# Altium PCB HVAL_TSAL.PcbDoc
Units mil, origin at the board's own origin, x right, y up, seen from the top; angles counter-clockwise.
Board outline 3937.01 x 3149.61 mil, 2 copper layers (Top, Bottom); 27 components, 31 nets, 125 pads, 5 vias.
Unrouted connection lines stored in the file: 1.
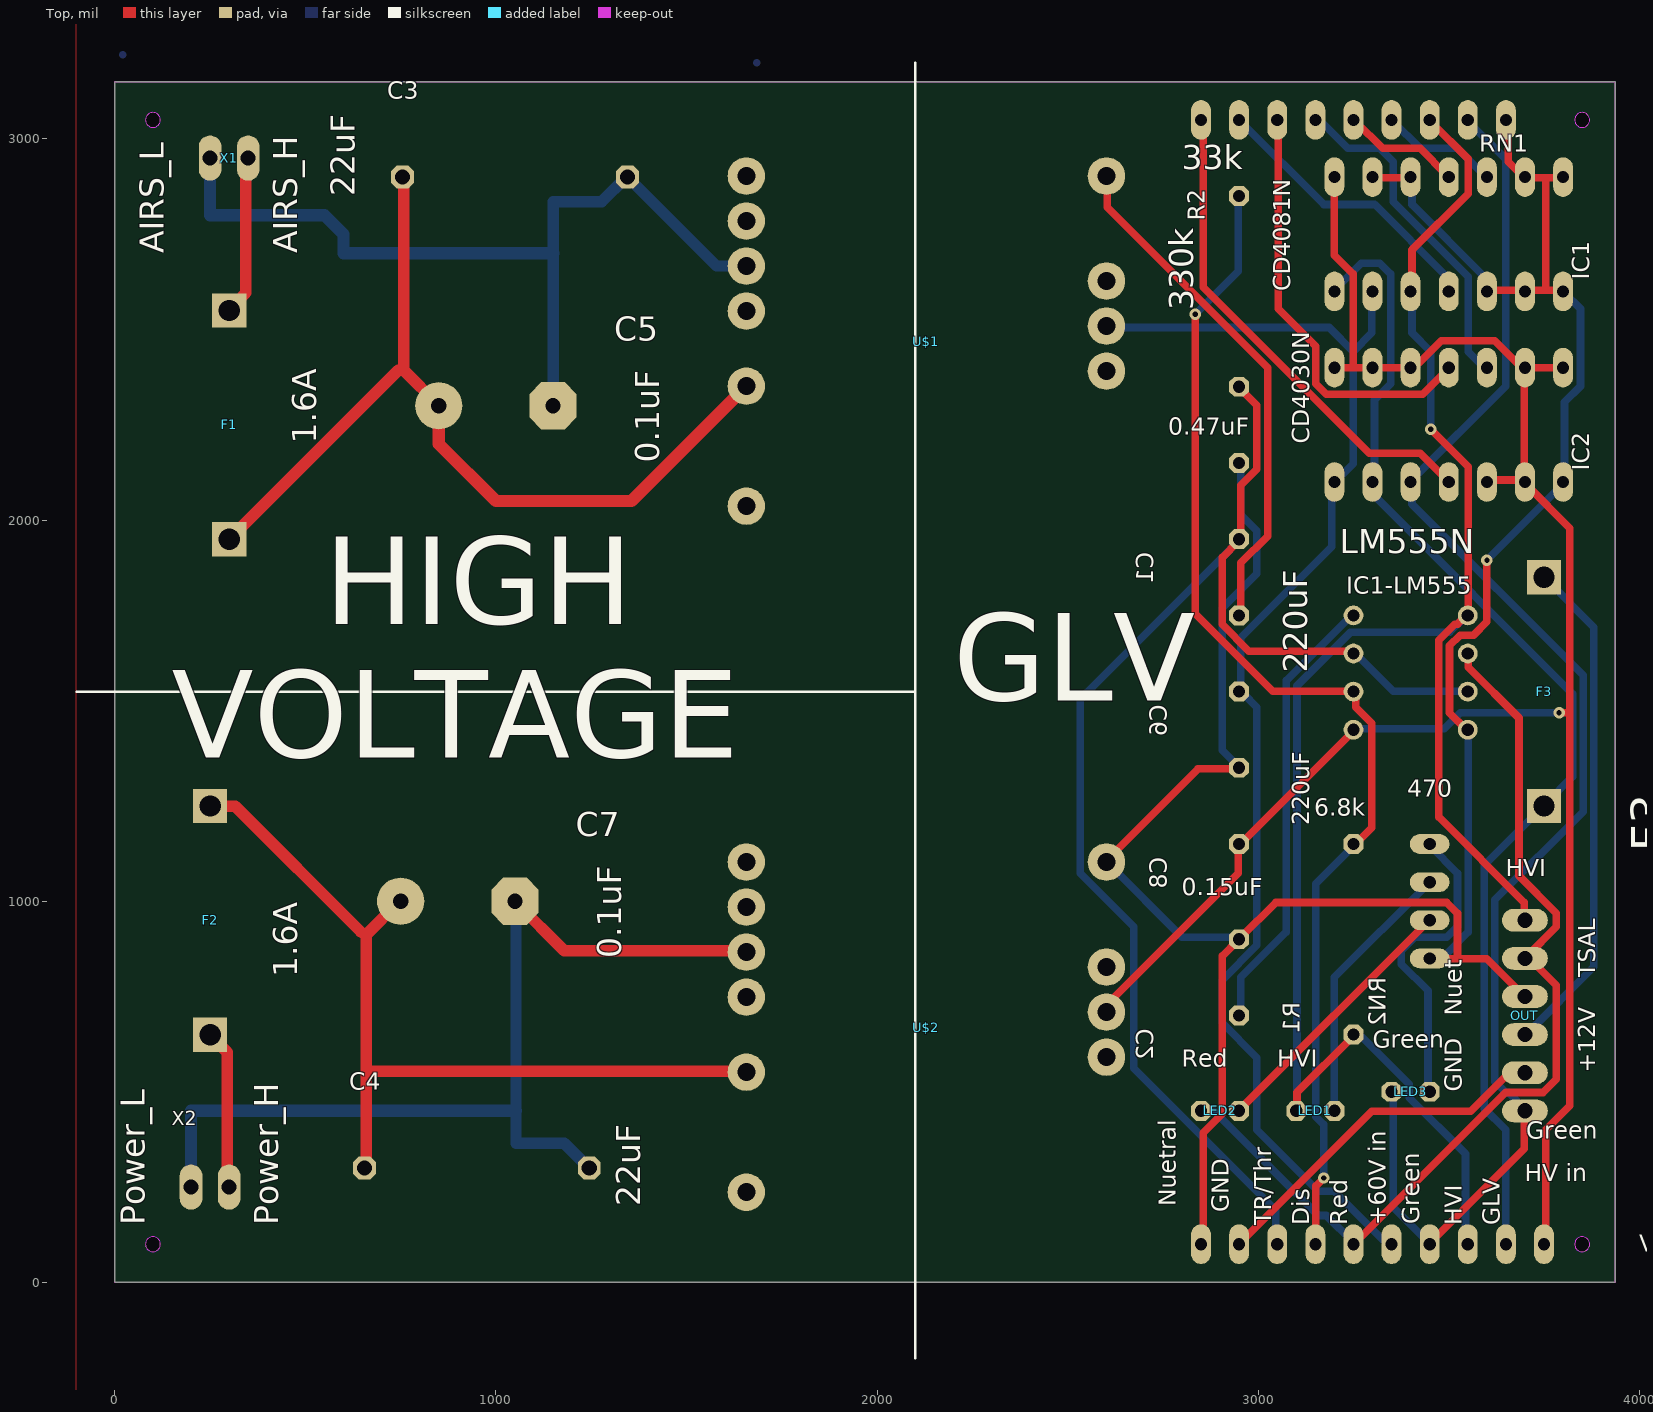
[diagram p0: Top view]
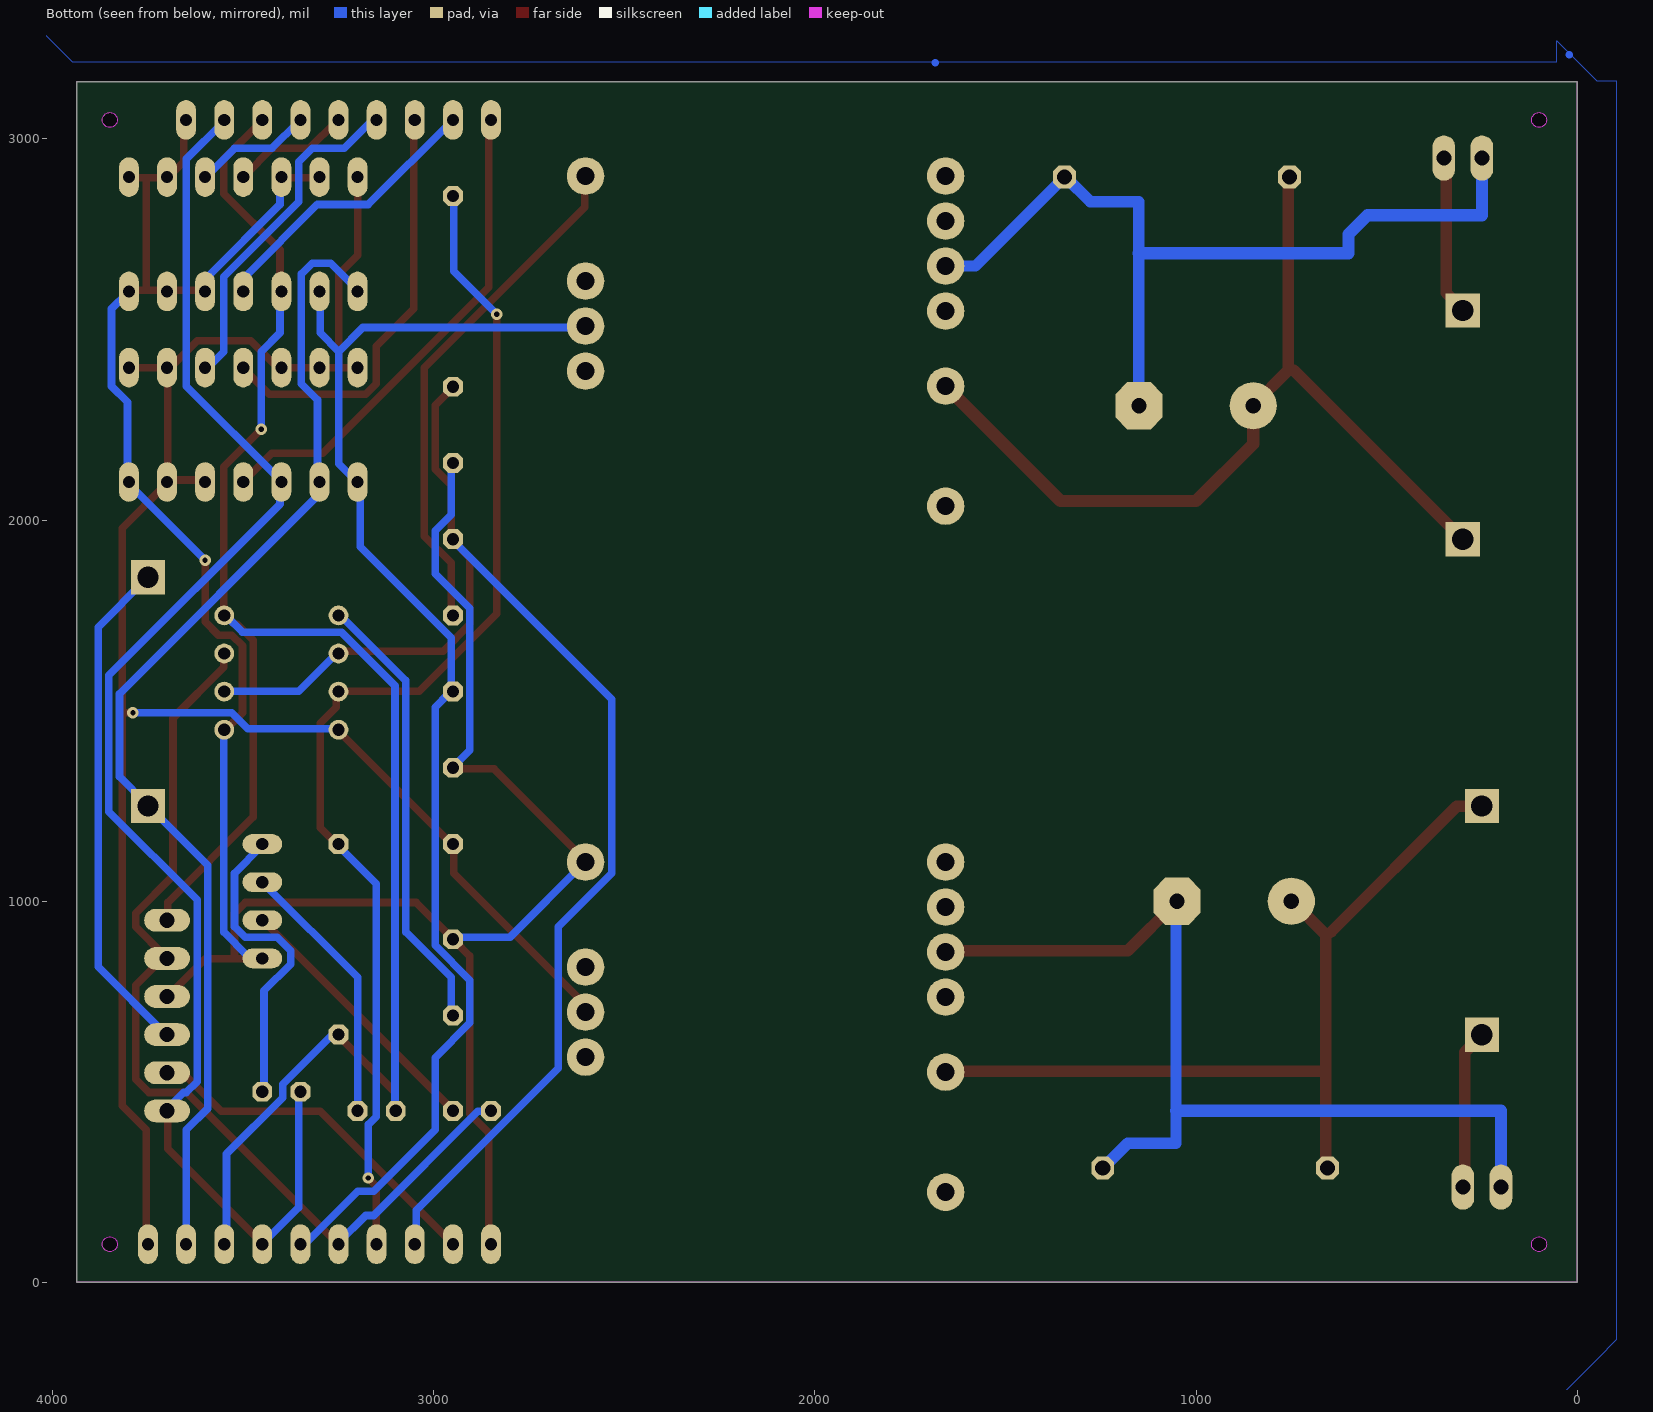
[diagram p1: Bottom view, seen from below]

## Layer stack, top to bottom
Top Solder: solder mask 0.4, Solder Resist, Dk 3.5
Top: signal copper 1.378
Dielectric 1: dielectric 12.6, FR-4, Dk 4.8
Bottom: signal copper 1.378
Bottom Solder: solder mask 0.4, Solder Resist, Dk 3.5

## Board outline
0,3149.61 0,0 3937.01,0 3937.01,3149.61
cut-out: 3850,3030.32 ccw(c3850,3050) 3869.68,3050 ccw(c3850,3050) 3850,3069.68 ccw(c3850,3050) 3830.32,3050 ccw(c3850,3050)
cut-out: 3850,80.31 ccw(c3850,100) 3869.68,100 ccw(c3850,100) 3850,119.69 ccw(c3850,100) 3830.32,100 ccw(c3850,100)
cut-out: 100,3030.32 ccw(c100,3050) 119.69,3050 ccw(c100,3050) 100,3069.68 ccw(c100,3050) 80.31,3050 ccw(c100,3050)
cut-out: 100,80.31 ccw(c100,100) 119.69,100 ccw(c100,100) 100,119.69 ccw(c100,100) 80.31,100 ccw(c100,100)

## Design rules (kind name [scope] priority, off if disabled: settings)
BoardOutlineClearance mdCopperDimension [All] p1: gap=10 ignorepadtopadclearanceinfootprint=FALSE except(0: Arc-SplitContinuation Track-SplitContinuation SMDPad-SplitContinuation THPad-SplitContinuation Via-SplitContinuation Fill-SplitContinuation Poly-SplitContinuation Region-SplitContinuation Text-SplitContinuation; 40: Poly-OutlineEdge Poly-CavityEdge Poly-CutoutEdge Poly-SplitBarrior)
Clearance "Clearance (Same Net)" [All] p1: gap=6 ignorepadtopadclearanceinfootprint=FALSE
Clearance "Clearance_for_NetClass_High Voltage" [InNetClass('High Voltage') vs InNetClass('High Voltage')] p2: gap=19.69 ignorepadtopadclearanceinfootprint=FALSE
Clearance [All] p3: gap=6 ignorepadtopadclearanceinfootprint=FALSE
HoleSize "HoleSize_For_NetClass_High Voltage" [InNetClass('High Voltage')] p1: absolutevalues=TRUE maxlimit=6.4 minlimit=6.4 maxpercent=80.000 minpercent=20.000
HoleSize [All] p2: absolutevalues=TRUE maxlimit=100000 minlimit=13.78 maxpercent=80.000 minpercent=20.000
HoleToHoleClearance mdDrill [All] p1: gap=6 allowstackedmicrovias=TRUE
MinimumSolderMaskSliver [All] p1 off: minsoldermaskwidth=10
PasteMaskExpansion mlMinCreamFrame [All] p1: expansion=0
PolygonConnect PolygonConnect_For_PolygonThermal_ON_Width60000_Gap100000 [InPolygonClass('PolygonThermal_ON_Width60000_Gap100000') vs Not IsVia] p1: connectstyle=Relief reliefconductorwidth=6 reliefentries=4 polygonreliefangle="90 Angle" airgapwidth=10
PolygonConnect ThermalVias [IsVia] p2: connectstyle=Direct reliefconductorwidth=10 reliefentries=4 polygonreliefangle="90 Angle" airgapwidth=10
PolygonConnect [All] p3: connectstyle=Relief reliefconductorwidth=10 reliefentries=4 polygonreliefangle="90 Angle" airgapwidth=10
RoutingVias [All] p1: holewidth=13.78 width=29.78 viastyle="Through Hole" minholewidth=13.78 minwidth=29.78 maxholewidth=100 maxwidth=100
SolderMaskExpansion mlMinStopFrame [All] p1: expansion=4 istentingtop=FALSE
Width "Width_For_NetClass_High Voltage" [InNetClass('High Voltage')] p1: maxlimit=60 minlimit=10 preferedwidth=30
Width [All] p2: maxlimit=10 minlimit=6 preferedwidth=6
26 further rules are at their usual default settings.

## Classes and differential pairs
polygon class PolygonThermal_ON_Width60000_Gap100000: Polygon_1_Net_N$12 Polygon_1_Net_N$13
net class "High Voltage": AIRS_H AIRS_L N$4 N$10 POWER_H POWER_L

## Components (designator, comment, footprint, x,y, rotation, side; value= is the part's Value field where it differs from the comment)
C1 "0.47u" C050-075X075 2950,2050 r90 top
C2 "0.15u" C050-075X075 2950,800 r90 top
C3 "22uF" C150-091X182 1050,2900 r0 top
C4 "22uF" C150-091X182 950,300 r0 top
C5 "0.1uF" E7,5-16 1000,2300 r0 top
C6 "220uF" C050-055X075 2950,1650 r90 top
C7 "0.1uF" E7,5-16 900,1000 r0 top
C8 "220uF" C050-055X075 2950,1250 r90 top
F1 "FUSEBLANK_5X20MM" FUSE_HOLDER_5X20MM 300,2550 r270 top
F2 "FUSEBLANK_5X20MM" FUSE_HOLDER_5X20MM 250,650 r90 top
F3 "FUSEBLANK_5X20MM" FUSE_HOLDER_5X20MM 3750,1250 r90 top
IC1 "4081N" DIL14 3500,2750 r0 top
IC1-LM555 "LM555N" DIL08 3400,1600 r90 top
IC2 "4030N" DIL14 3500,2250 r0 top
LED1 "" LED3MM 3150,450 r0 top
LED2 "" LED3MM 2900,450 r0 top
LED3 "" LED3MM 3400,500 r0 top
OUT "22-27-2061-06" 6410-06 3700,700 r90 top
R1 "6.8k" 0309/12 3250,900 r90 top
R2 "330k" 0309/12 2950,2600 r90 top
RN1 "33k" SIL9 3250,3050 r180 top
RN2 "470" SIL4 3450,1000 r90 top
U$1 "" EPM1205SJ 2100,2450 r0 top
U$2 "" EPM1205SJ 2100,650 r0 top
VCC "" FE10 3300,100 r0 top
X1 "22-23-2021 - AIRS" 22-23-2021 300,2950 r0 top
X2 "22-23-2021 -Pow" 22-23-2021 250,250 r0 top

## Footprints (in the part's own frame and the unit in brackets; to place one, negate y for a bottom-side part, rotate by r counter-clockwise, add the part's x,y. Pads: shape width x height; smd on the part's side, far side on the other; paste and mask are expansions set on the pad)
22-23-2021 [mm] "22-23-2021"
  oval 1.508x3.016 hole 1: 1(-1.27,0) 2(1.27,0)
  body extent -2.03,-1.51 2.03,1.51, height 1.27
0309/12 [mil] "0309/12"
  oct 52x52 / inner round 48.04 / far side oct 52x52 hole 32: 1(-250,0) 2(250,0)
  body extent -274,-24 274,24, height 150
6410-06 [mil] "6410-06"
  oval 60x120 hole 40: 1(250,0) 2(150,0) 3(50,0) 4(-50,0) 5(-150,0) 6(-250,0)
  body extent -280,-60 280,60, height 150
C050-055X075 [mil] "C050-055X075"
  oct 52x52 / inner round 48.04 / far side oct 52x52 hole 32: 1(-100,0) 2(100,0)
  body extent -124,-24 124,24, height 50
C050-075X075 [mil] "C050-075X075"
  oct 52x52 / inner round 48.04 / far side oct 52x52 hole 32: 1(-100,0) 2(100,0)
  body extent -124,-24 124,24, height 50
C150-091X182 [mil] "C150-091X182"
  oct 60x60 / inner round 55.43 / far side oct 60x60 hole 40: 1(-295,0) 2(295,0)
  body extent -323,-28 323,28, height 50
DIL08 [mil] "DIL08"
  round 52 hole 32: 1(-150,-150) 2(-50,-150) 3(50,-150) 4(150,-150) 5(150,150) 6(50,150) 7(-50,150) 8(-150,150)
  body extent -176,-176 176,176, height 50
DIL14 [mil] "DIL14"
  oval 52x104 hole 32: 1(-300,-150) 2(-200,-150) 3(-100,-150) 4(0,-150) 5(100,-150) 6(200,-150) 7(300,-150) 8(300,150) 9(200,150) 10(100,150) 11(0,150) 12(-100,150) 13(-200,150) 14(-300,150)
  body extent -326,-202 326,202, height 50
E7,5-16 [mil] "E7,5-16"
  round 124 hole 40: +(-150,0)
  oct 124x124 / inner round 114.56 / far side oct 124x124 hole 40: -(150,0)
  body extent -212,-62 208,62, height 50
EPM1205SJ [mil] "EPM1205SJ"
  round 98.43 hole 47.24: 4(501.97,-59.06) 5(501.97,59.06) 6(501.97,177.17) 7(501.97,452.76) 8(-442.91,452.76) 9(-442.91,334.65) 10(-442.91,216.54) 11(-442.91,98.43) 12(-442.91,-98.43) 14(-442.91,-413.39)
  body extent -581,-630 640,669, height 150
FE10 [mil] "FE10"
  oval 52x104 hole 32: 1(-450,0) 2(-350,0) 3(-250,0) 4(-150,0) 5(-50,0) 6(50,0) 7(150,0) 8(250,0) 9(350,0) 10(450,0)
  body extent -476,-52 476,52, height 150
FUSE_HOLDER_5X20MM [mil] "FUSE_HOLDER_5X20MM"
  rect 90x90 / inner round 83.15 / far side rect 90x90 hole 56: 1(0,0) 2(600,0)
  body extent -42,-42 642,42, height 50
LED3MM [mil] "LED3MM"
  oct 52x52 / inner round 48.04 / far side oct 52x52 hole 32: A(-50,0) K(50,0)
  body extent -85,-55 74,55, height 150
SIL4 [mil] "SIL4"
  oval 52x104 hole 32: 1(-150,0) 2(-50,0) 3(50,0) 4(150,0)
  body extent -183,-52 176,52, height 150
SIL9 [mil] "SIL9"
  oval 52x104 hole 32: 1(-400,0) 2(-300,0) 3(-200,0) 4(-100,0) 5(0,0) 6(100,0) 7(200,0) 8(300,0) 9(400,0)
  body extent -433,-52 426,52, height 150

## Part data
C1 C2: library part C050-075X075, PackageName=C050-075X075
C3 C4: library part C150-091X182, PackageName=C150-091X182
C5 C7: library part E7,5-16, PackageName=E7,5-16
C6 C8: library part C050-055X075, PackageName=C050-055X075
F1 F2 F3: library part FUSE_HOLDER_5X20MM, PackageName=FUSE_HOLDER_5X20MM
IC1 IC2: library part DIL14, PackageName=DIL14
IC1-LM555: library part DIL08, PackageName=DIL08
LED1 LED2 LED3: library part LED3MM, PackageName=LED3MM
OUT: library part 6410-06, PackageName=6410-06
R1 R2: library part 0309/12, PackageName=0309/12
RN1: library part SIL9, PackageName=SIL9
RN2: library part SIL4, PackageName=SIL4
U$1 U$2: library part EPM1205SJ, PackageName=EPM1205SJ
VCC: library part FE10, PackageName=FE10
X1 X2: library part 22-23-2021, PackageName=22-23-2021

## Free pads (board coordinates)
  round 39.37 hole 39.37 unplated: MH1(100,3050) MH2(100,100) MH3(3850,3050) MH4(3850,100)

## Via types
v1: diameter 29.78/29.78 (per signal layer), hole 13.78, Top to Bottom, 5 vias

## Nets (pads, with @x,y where several pads share a name; then routed paths per layer and width w, separated by ;. In a path a pad name is that pad's centre, name@x,y a point inside that pad or via, vN(x,y) a via of type N, cw(c..) or ccw(c..) an arc to the next point about the centre after c; other vN are vias at no path point)
0: OUT.5 VCC.2 | length 937
  Top w20: VCC.2 2954.46,105.27 3298.33,449.13 3557.98,449.13 3656.23,547.38 3698.34,547.38 OUT.5
AIRS_CLSD_H: C6.1 IC1.2 IC2.1 U$1.5 VCC.6 | length 3601.3
  Bottom w20: U$1.5 2603.57,2505.32 3186.04,2505.32 3249.2,2442.17 ; IC1.2 3298.33,2596.56 3298.33,2491.29 3249.2,2442.17 ; VCC.6 3347.45,105.27 3333.42,105.27 3200.08,238.6 3157.97,238.6 2996.57,400.01 2996.57,589.49 2905.33,680.72 2905.33,793 2996.57,884.23 2996.57,1508.81 2961.48,1543.9 C6.1 2954.46,1550.92 2954.46,1691.27 3193.06,1929.87 3193.06,2098.3 IC2.1 3207.1,2105.32 3249.2,2147.42 3249.2,2442.17
AIRS_CLSD_L: C6.2 U$1.7 | length 1358.4
  Top w20: U$1.7 2603.57,2898.32 2603.57,2821.12 3024.64,2400.06 3024.64,1957.94 2954.46,1887.77 2954.46,1754.43 C6.2
AIRS_H: C3.1 C5.+ F1.2 U$1.12 | length 2375.1
  Top w30: F1.2 301.76,1950.93 743.88,2393.04 757.91,2393.04 ; C3.1 757.91,2898.32 757.91,2393.04 ; C5.+ 849.14,2301.81 757.91,2393.04
  Top w32: C5.+ 850,2200 1000,2050 1355.51,2050 U$1.12
AIRS_L: C3.2 C5.- U$1.10 X1.1 | length 2289.8
  Bottom w30: X1.1 X1.1@252.64,2947.44 ; C5.- 1150.91,2301.81 1150.91,2700 1150.91,2835.16 1277.22,2835.16 1340.38,2898.32 C3.2 1354.42,2891.3 1578.99,2666.73 1656.18,2666.73 U$1.10
  Bottom w32: X1.1 250,2800 550,2800 600,2750 600,2700 1150.91,2700
DIS: IC1-LM555.7 R1.2 R2.2 VCC.4 | length 3194.3
  Top w20: v1(2835.16,2540.41) 2835.16,1754.43 3038.67,1550.92 3242.19,1550.92 IC1-LM555.7 3256.22,1543.9 3256.22,1508.81 3298.33,1466.7 3298.33,1193.01 3256.22,1150.91 R1.2 ; VCC.4 3150.95,105.27 3150.95,252.64 v1(3172.01,273.69)
  Bottom w20: v1(2835.16,2540.41) 2947.44,2652.7 2947.44,2849.19 R2.2 ; v1(3172.01,273.69) 3172.01,414.05 3150.95,435.1 3150.95,1045.64 3249.2,1143.89 R1.2
GND: C1.2 C2.2 C8.2 IC1-LM555.1 IC1.5 IC1.6 IC1.7 IC1.8 IC1.9 IC1.12 IC1.13 IC2.7 OUT.3 RN1.1 RN2.1 U$2.7 VCC.1 | length 6914.9
  Top w20: U$2.7 2603.57,1108.8 2842.18,1347.4 2947.44,1347.4 C8.2 ; VCC.1 2856.21,105.27 2856.21,392.99 2905.33,442.12 2905.33,856.16 2947.44,898.27 C2.2 2954.46,905.29 3045.69,996.52 3494.82,996.52 3522.89,968.44 3522.89,849.14 ; IC1.13 3305.34,2898.32 3396.57,2898.32 IC1.12 ; RN2.1 3452.72,849.14 3522.89,849.14 ; IC1-LM555.1 3543.95,1452.67 3501.84,1494.77 3501.84,1670.22 3529.91,1698.29 3565,1698.29 3600.09,1733.38 v1(3600.09,1894.78) ; IC1.5 3600.09,2603.57 3698.34,2603.57 IC1.6 3705.35,2603.57 3754.48,2603.57 ; RN1.1 3656.23,3045.69 3656.23,2940.42 3691.32,2905.33 IC1.9 3705.35,2898.32 3754.48,2898.32 ; OUT.3 3698.34,750.9 3600.09,849.14 3522.89,849.14 ; IC1.7 3796.58,2603.57 3754.48,2603.57 ; IC1.8 3796.58,2898.32 3754.48,2898.32 ; 3754.48,2603.57 3754.48,2898.32
  Bottom w20: U$2.7 2603.57,1101.78 2800.07,905.29 2947.44,905.29 C2.2 ; C8.2 2947.44,1354.42 2905.33,1396.53 2905.33,1768.46 2996.57,1859.69 2996.57,1971.98 2954.46,2014.08 2954.46,2147.42 C1.2 ; IC1.12 3403.59,2898.32 3403.59,2828.14 3593.07,2638.66 3593.07,2603.57 IC1.5 ; RN2.1 3452.72,856.16 3487.81,856.16 3550.96,919.32 3550.96,1445.65 IC1-LM555.1 ; v1(3600.09,1894.78) 3796.58,2091.28 IC2.7 3803.6,2105.32 3803.6,2308.83 3845.71,2350.94 3845.71,2554.45 3803.6,2596.56 IC1.7
GREEN: IC2.3 LED3.A OUT.6 RN1.2 VCC.7 | length 3958.4
  Top w20: VCC.7 3452.72,105.27 3698.34,350.89 3698.34,449.13 OUT.6
  Bottom w20: LED3.A 3354.47,498.26 3354.47,196.5 3445.7,105.27 VCC.7 ; RN1.2 3550.96,3045.69 3649.21,2947.44 3649.21,2350.94 3403.59,2105.32 IC2.3 3403.59,2091.28 3403.59,2042.16 3852.73,1593.02 3852.73,1235.12 3621.14,1003.53 3621.14,526.33 3649.21,498.26 3656.23,498.26 3698.34,456.15 OUT.6
N$1: LED2.K RN2.2 | length 707.3
  Top w20: LED2.K 2954.46,456.15 3445.7,947.39 RN2.2
N$2: IC2.10 RN1.6 | length 897.7
  Bottom w20: RN1.6 3150.95,3045.69 3164.99,3045.69 3235.17,2975.51 3319.38,2975.51 3354.47,2940.42 3354.47,2835.16 3550.96,2638.66 3550.96,2442.17 3593.07,2400.06 IC2.10
N$3: IC1.11 RN1.5 | length 311.7
  Top w20: RN1.5 3256.22,3045.69 3326.4,2975.51 3424.65,2975.51 3494.82,2905.33 IC1.11
N$4: F2.1 X2.2 | length 421.4
  Top w30: F2.1 252.64,645.63 294.74,603.52 294.74,252.64 X2.2
N$5: F3.2 OUT.4 | length 1330.2
  Bottom w20: OUT.4 3705.35,652.65 3880.8,828.09 3880.8,1719.34 3754.48,1845.66 F3.2
N$6: IC1.10 RN1.4 | length 311.7
  Bottom w20: RN1.4 3354.47,3045.69 3424.65,2975.51 3522.89,2975.51 3593.07,2905.33 IC1.10
N$7: C2.1 IC1-LM555.5 | length 1184
  Bottom w20: C2.1 2954.46,701.77 2954.46,800.02 3073.76,919.32 3073.76,1578.99 3249.2,1754.43 IC1-LM555.5
N$8: IC2.4 RN1.9 | length 1298
  Top w20: RN1.9 2856.21,3045.69 2856.21,2610.59 3291.31,2175.49 3424.65,2175.49 3494.82,2105.32 IC2.4
N$9: IC1.4 RN1.8 | length 756.5
  Bottom w20: RN1.8 2954.46,3045.69 3172.01,2828.14 3305.34,2828.14 3494.82,2638.66 3494.82,2603.57 IC1.4
N$10: F1.1 X1.2 | length 421.9
  Top w30: F1.1 301.76,2554.45 343.87,2596.56 343.87,2947.44 X1.2
N$11: IC2.11 RN1.7 | length 1123.9
  Top w20: RN1.7 3052.71,3045.69 3052.71,2554.45 3150.95,2456.2 3150.95,2357.95 3179.03,2329.88 3431.66,2329.88 3494.82,2393.04 IC2.11
N$12: 
N$13:  | length 0.1
  Bottom w20: 21.05,3221.13 21.09,3221.09 ; 1684.25,3200 1684.25,3200.08
N$14: LED1.K RN2.3 | length 703.5
  Bottom w20: LED1.K 3200.08,456.15 3200.08,800.02 3445.7,1045.64 RN2.3
N$15: LED3.K RN2.4 | length 820.6
  Bottom w20: LED3.K 3445.7,505.28 3445.7,764.93 3375.52,835.11 3375.52,870.2 3410.61,905.29 3494.82,905.29 3522.89,933.36 3522.89,1073.71 3452.72,1143.89 RN2.4
N$16: 
POWER_H: C4.1 C7.+ F2.2 U$2.12 | length 2289.2
  Top w30: F2.2 252.64,1249.15 315.8,1249.15 645.63,919.32 659.67,912.3 ; C4.1 659.67,301.76 659.67,554.4 ; C7.+ 743.88,996.52 659.67,912.3 ; U$2.12 1656.18,554.4 659.67,554.4 ; 659.67,554.4 659.67,912.3
POWER_L: C4.2 C7.- U$2.10 X2.1 | length 2571.6
  Top w30: C7.- 1052.66,996.52 1178.98,870.2 1656.18,870.2 U$2.10
  Bottom w30: C7.- 1052.66,996.52 1052.66,450 1052.66,364.92 1178.98,364.92 1242.14,301.76 C4.2
  Bottom w32: X2.1 200,450 1052.66,450
RED: IC1-LM555.4 IC1.3 LED1.A OUT.1 R1.1 RN1.3 VCC.8 | length 4981.4
  Top w20: LED1.A 3101.83,456.15 3101.83,498.26 3249.2,645.63 R1.1 ; IC1.3 3403.59,2603.57 3403.59,2708.84 3550.96,2856.21 3550.96,2947.44 3452.72,3045.69 RN1.3 ; v1(3452.72,2238.65) 3550.96,2140.4 3550.96,1754.43 IC1-LM555.4 3543.95,1747.41 3522.89,1726.36 3515.88,1726.36 3473.77,1684.25 3473.77,1221.08 3698.34,996.52 3698.34,954.41 OUT.1
  Bottom w20: LED1.A 3101.83,456.15 3101.83,1564.95 3242.19,1705.31 3501.84,1705.31 3543.95,1747.41 IC1-LM555.4 ; R1.1 3256.22,645.63 3270.26,645.63 3396.57,519.31 3396.57,484.22 3543.95,336.85 3543.95,105.27 VCC.8 ; IC1.3 3403.59,2596.56 3403.59,2491.29 3452.72,2442.17 v1(3452.72,2238.65)
TR_THR: C1.1 IC1-LM555.2 IC1-LM555.6 R2.1 VCC.3 | length 3637.3
  Top w20: R2.1 2954.46,2343.92 2996.57,2301.81 2996.57,2133.39 2954.46,2091.28 2954.46,1950.93 C1.1 2947.44,1943.91 2905.33,1901.8 2905.33,1726.36 2975.51,1656.18 3249.2,1656.18 IC1-LM555.6
  Bottom w20: C1.1 2947.44,1943.91 2533.4,1529.86 2533.4,1073.71 2673.75,933.36 2673.75,561.42 3045.69,189.48 3045.69,105.27 VCC.3 ; IC1-LM555.6 3256.22,1649.16 3354.47,1550.92 3543.95,1550.92 IC1-LM555.2
TSAL_OUT: IC1-LM555.3 LED2.A OUT.2 VCC.5 | length 2546.4
  Top w20: VCC.5 3256.22,105.27 3649.21,498.26 3747.46,498.26 3782.55,533.35 3782.55,778.97 3712.37,849.14 OUT.2 3705.35,856.16 3782.55,933.36 3782.55,968.44 3684.3,1066.69 3684.3,1480.74 3550.96,1614.07 3550.96,1649.16 IC1-LM555.3
  Bottom w20: LED2.A 2856.21,449.13 2884.28,449.13 3157.97,175.44 3179.03,175.44 3249.2,105.27 VCC.5
VCC: C8.1 IC1-LM555.8 IC1.14 IC2.5 IC2.6 IC2.8 IC2.9 IC2.12 IC2.13 IC2.14 U$2.5 VCC.10 | length 5254.9
  Top w20: U$2.5 2603.57,715.81 2603.57,729.84 2947.44,1073.71 2947.44,1143.89 C8.1 2954.46,1150.91 3249.2,1445.65 IC1-LM555.8 ; IC2.14 3200.08,2400.06 3249.2,2400.06 ; IC1.14 3200.08,2898.32 3200.08,2694.8 3249.2,2645.68 3249.2,2400.06 ; IC2.5 3607.11,2105.32 3691.32,2105.32 IC2.6 ; VCC.10 3754.48,105.27 3754.48,400.01 3817.64,463.17 3817.64,1494.77 ; v1(3789.57,1494.77) 3817.64,1494.77 ; IC2.8 3796.58,2400.06 3705.35,2400.06 IC2.9 ; 3249.2,2400.06 3298.33,2400.06 IC2.13 3305.34,2400.06 3396.57,2400.06 IC2.12 3403.59,2407.08 3417.63,2407.08 3480.79,2470.24 3621.14,2470.24 3691.32,2400.06 IC2.9 ; IC2.6 3705.35,2091.28 3817.64,1979 3817.64,1494.77 ; IC2.6 3698.34,2105.32 3698.34,2393.04 IC2.9
  Bottom w20: IC1-LM555.8 3256.22,1452.67 3487.81,1452.67 3529.91,1494.77 v1(3789.57,1494.77)
VDD: F3.1 IC1.1 IC2.2 VCC.9 | length 3093.2
  Bottom w20: IC1.1 3200.08,2603.57 3270.26,2673.75 3319.38,2673.75 3347.45,2645.68 3347.45,2357.95 3305.34,2315.85 3305.34,2105.32 IC2.2 3305.34,2091.28 3305.34,2063.21 3824.66,1543.9 3824.66,1326.35 3754.48,1256.17 F3.1 3747.46,1249.15 3593.07,1094.76 3593.07,456.15 3649.21,400.01 3649.21,105.27 VCC.9
pads on no net: U$1.4 U$1.6 U$1.8 U$1.9 U$1.11 U$1.14 U$2.4 U$2.6 U$2.8 U$2.9 U$2.11 U$2.14

## Polygon pours and split planes (outlines as drawn)
N$12 on Top "Polygon_1_Net_N$12" (solid, remove dead copper, pour order 1): -103,3357.24 -103,-303 4451.24,-303 4503,-251.24 4503,2901.24 4101.24,3303 -48.76,3303
N$13 on Bottom "Polygon_1_Net_N$13" (solid, remove dead copper, pour order 0): 53,3257.24 -51.24,3153 -103,3153 -103,-151.24 -52.12,-202.12 198.76,-453 4207.24,-453 4153,-398.76 4153,3407.24 3948.76,3203 53,3203

## Keep-outs
Keep-Out Layer:
  the board outline again, w0

## Silkscreen, mask and mechanical layers (free items; w line width, h text height)
Top Overlay:
  lines w6: -100,1550 2100,1550 ; 2100,-200 2100,1550 ; 2100,3200 2100,1550
  text "33k" at 2800,2900 h108.5
  text "22uF" at 650,2850 h108.5 r90
  text "AIRS_L" at 150,2700 h108.5 r90
  text "AIRS_H" at 500,2700 h108.5 r90
  text "CD4081N" at 3100,2600 h77.5 r90
  text "330k" at 2850,2550 h108.5 r90
  text "0.47uF" at 2764.51,2208.27 h77.5
  text "1.6A" at 550,2200 h108.5 r90
  text "CD4030N" at 3150,2200 h77.5 r90
  text "0.1uF" at 1450,2150 h108.5 r90
  text "LM555N" at 3214.53,1892.69 h108.5
  text "HIGH" at 550,1650 h393.7
  text "220uF" at 3150,1600 h108.5 r90
  text "GLV" at 2200,1450 h393.7
  text "VOLTAGE" at 150,1300 h393.7
  text "470" at 3391.77,1258.14 h77.5
  text "6.8k" at 3147.01,1208.2 h77.5
  text "220uF" at 3150,1200 h77.5 r90
  text "HVI" at 3650,1050 h77.5
  text "0.15uF" at 2800,1000 h77.5
  text "0.1uF" at 1350,850 h108.5 r90
  text "1.6A" at 500,800 h108.5 r90
  text "TSAL" at 3900,800 h77.5 r90
  text "Nuet" at 3550,700 h77.5 r90
  text "Green" at 3300,600 h77.5
  text "Red" at 2800,550 h77.5
  text "HVI" at 3050,550 h77.5
  text "+12V" at 3900,550 h77.5 r90
  text "GND" at 3550,500 h77.5 r90
  text "Green" at 3703.08,361.17 h77.5
  text "HV in" at 3700,250 h77.5
  text "22uF" at 1400,200 h108.5 r90
  text "Nuetral" at 2800,200 h77.5 r90
  text "GND" at 2938.83,184.09 h77.5 r90
  text "Green" at 3438.83,153.08 h77.5 r90
  text "Power_L" at 100,150 h108.5 r90
  text "Power_H" at 450,150 h108.5 r90
  text "TR/Thr" at 3050,150 h77.5 r90
  text "Dis" at 3150,150 h77.5 r90
  text "Red" at 3250,150 h77.5 r90
  text "+60V in" at 3350,150 h77.5 r90
  text "HVI" at 3550,150 h77.5 r90
  text "GLV" at 3650,150 h77.5 r90
Dimension:
  the board outline again, w0

## Dimensions
300,1950 to 300,1250 on tFinish
1650,200 to 2600,200 on tFinish

## Text inside footprints (layer, text, board x,y; h text height)
OUT: tPlace "6" at 3717.06,353.94 h77.5 r90; tPlace "1" at 3714.06,1013.94 h77.5 r90
RN1: tPlace "1" at 3740,3070 h60.45 r180
RN2: tPlace "1" at 3470,760 h60.45 r90
VCC: tPlace "10" at 3705,160 h77.5; tPlace "1" at 2830,160 h77.5